# Altium PCB 单路驱动.PcbDoc
Units mil, origin at the board's own origin, x right, y up, seen from the top; angles counter-clockwise.
Board outline 2236.22 x 1855 mil, 2 copper layers (Top Layer, Bottom Layer); 48 components, 31 nets, 123 pads, 22 vias.
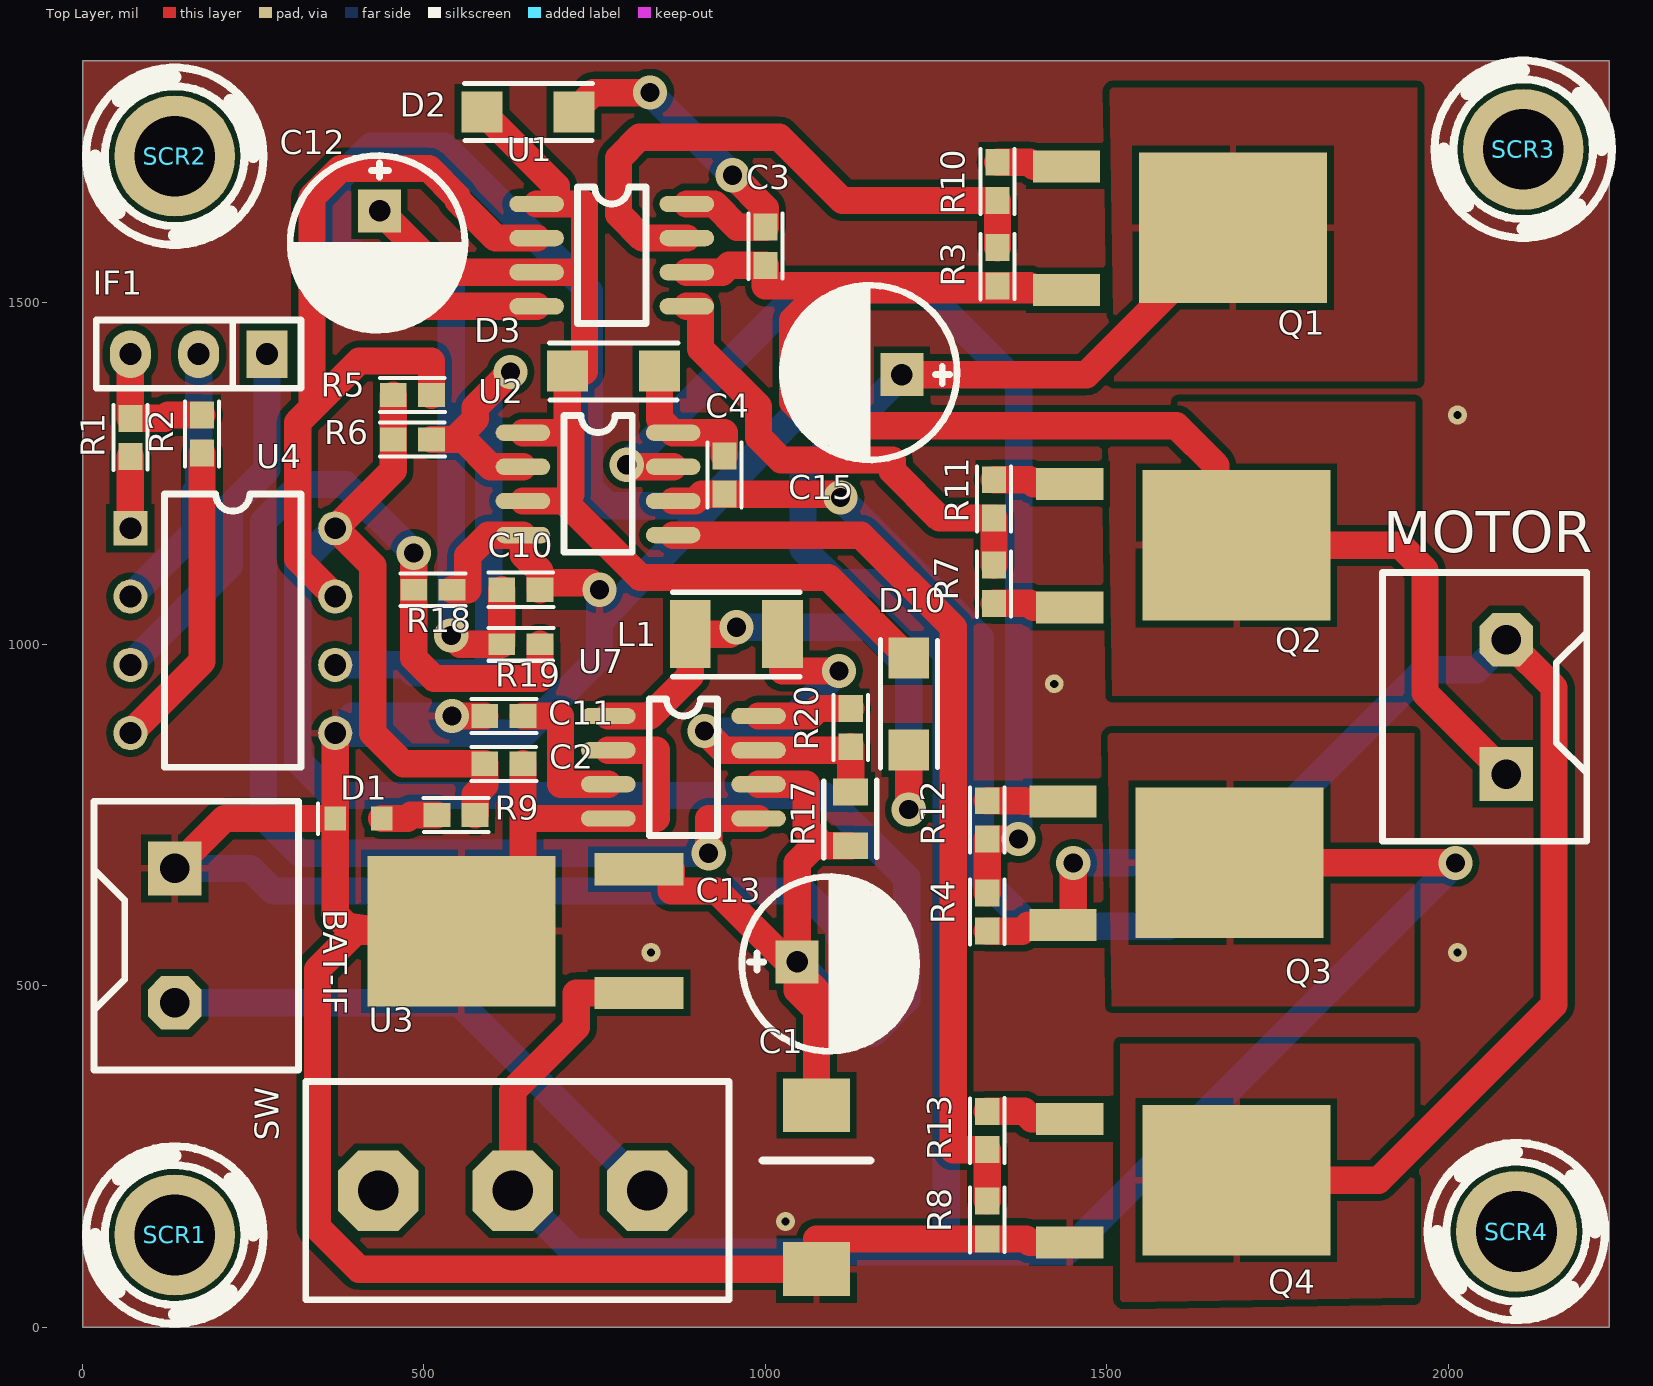
[diagram p0: Top Layer view]
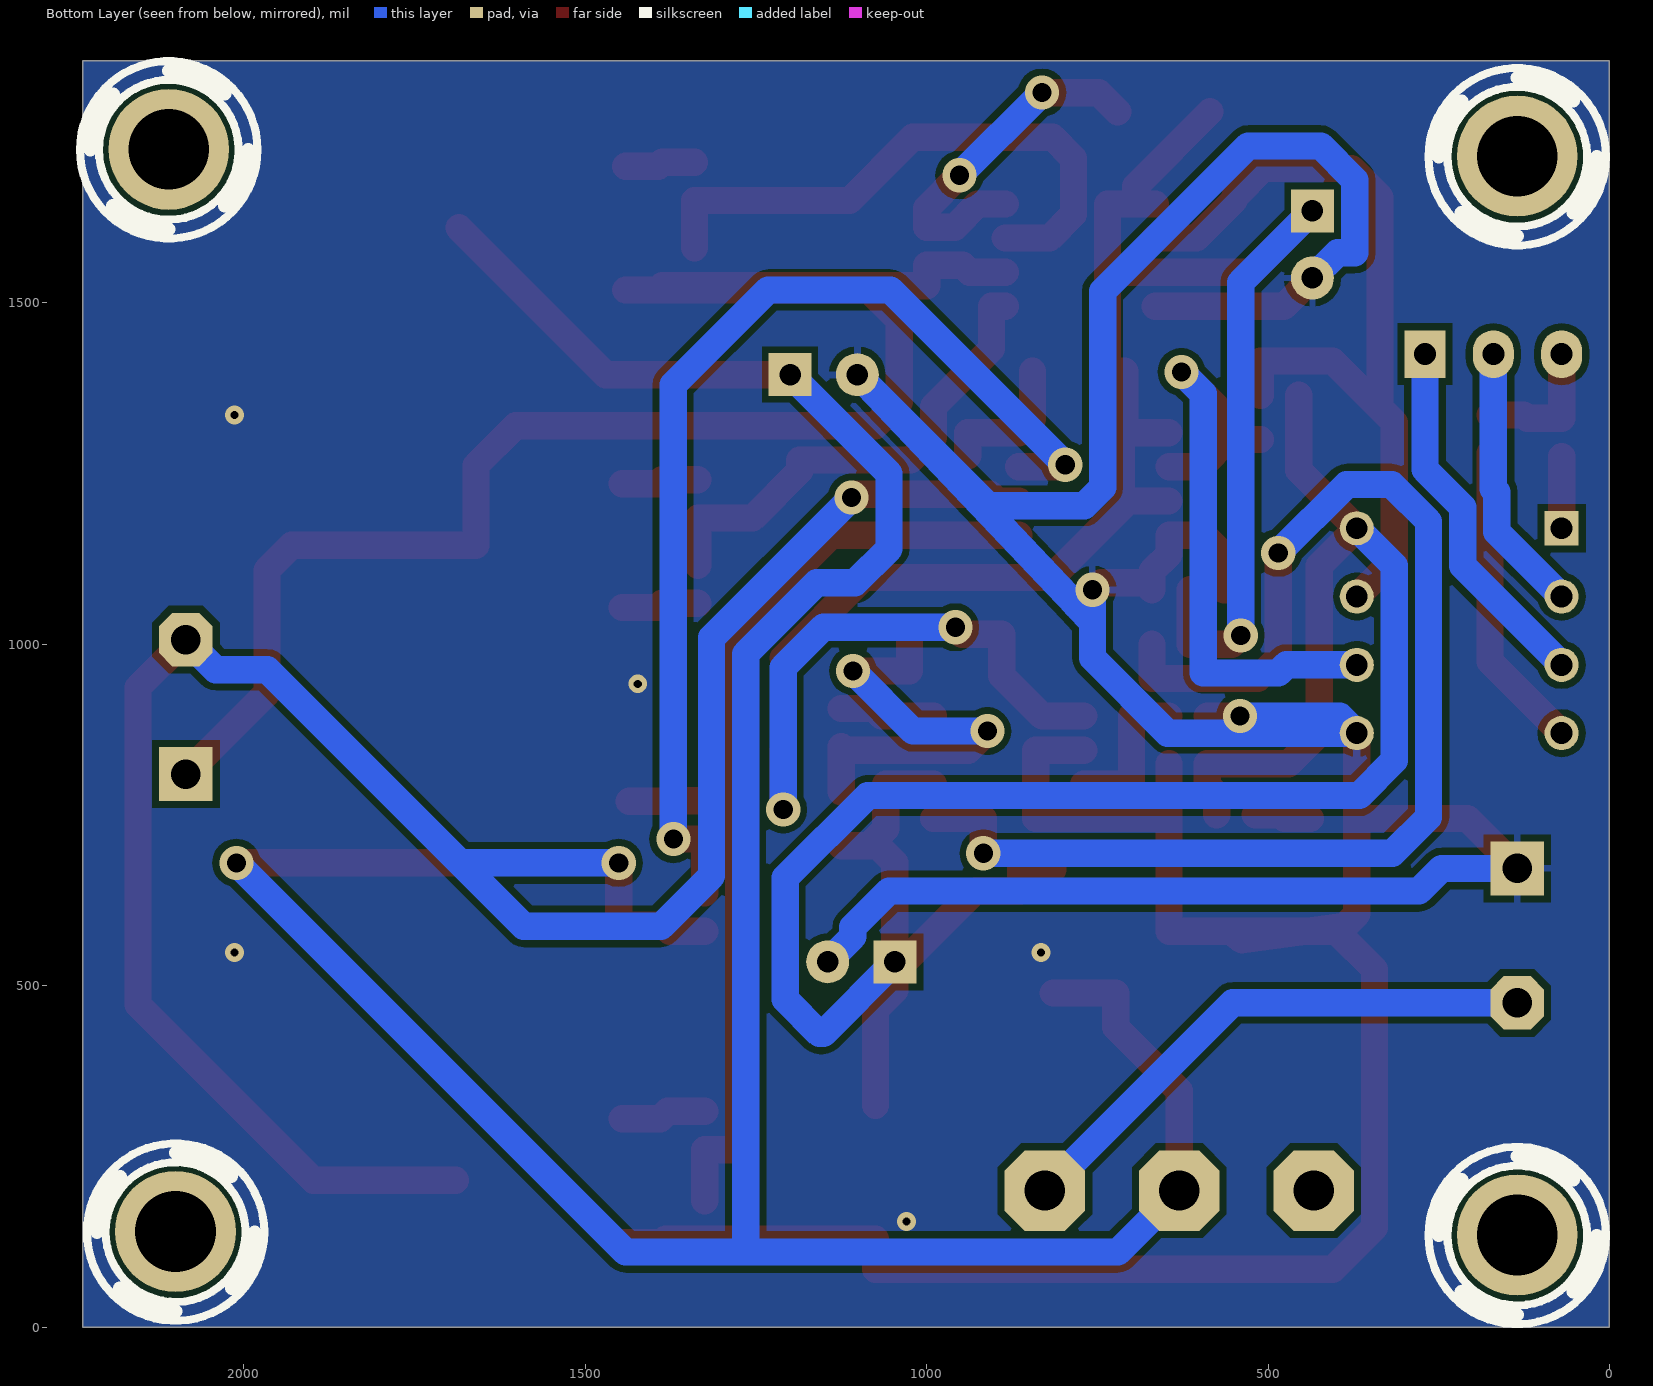
[diagram p1: Bottom Layer view, seen from below]

## Layer stack, top to bottom
Top Solder: solder mask 0.4, Solder Resist, Dk 3.5
Top Layer: signal copper 1.4
Dielectric 1: dielectric 12.6, FR-4, Dk 4.8
Bottom Layer: signal copper 1.4
Bottom Solder: solder mask 0.4, Solder Resist, Dk 3.5

## Board outline
0,0 2236.22,0 2236.22,1855 0,1855

## Design rules (kind name [scope] priority, off if disabled: settings)
Clearance [All] p1: gap=10 ignorepadtopadclearanceinfootprint=FALSE except(0: Arc-Hole Track-Hole SMDPad-Hole THPad-Hole Via-Hole Fill-Hole Poly-Hole Region-Hole Text-Hole)
ComponentClearance [All] p1 off: gap=10 collisioncheckmode=3 verticalgap=10 showdistances=FALSE
Height [All] p1 off: minheight=0 maxheight=1000 prefheight=500
PolygonConnect [All] p1: connectstyle=Relief reliefconductorwidth=10 reliefentries=4 polygonreliefangle="90 Angle" airgapwidth=10
RoutingVias [All] p1: holewidth=28 width=50 viastyle="Through Hole" minholewidth=28 minwidth=50 maxholewidth=28 maxwidth=50
SolderMaskExpansion [All] p1: expansion=4 istentingtop=FALSE
Width Width_1 [All] p1: maxlimit=50 minlimit=30 preferedwidth=40 minimp=50.000000 maximp=50.000000 favimp=50.000000
28 further rules are at their usual default settings.

## Classes and differential pairs
net class 12V: 12V VCC5V VCC12V

## Components (designator, comment, footprint, x,y, rotation, side; value= is the part's Value field where it differs from the comment)
BAT-IF "LQ_PIN2" LQ_PIN2 135,671.85 r270 top
C1 "330u" LQ_7343D 1075,325 r90 top
C2 "104" LQ_0603 589,825 r0 top
C3 "105" LQ_0603 1000,1611 r270 top
C4 "105" LQ_0603 940,1276 r270 top
C10 "0.1u" LQ_0603 614,1080 r0 top
C11 "220p" LQ_0603 645,895 r180 top
C12 "330u" LQ_220U16V 435,1635 r270 top
C13 "220u" LQ_220U16V 1046.57,535 r0 top
C15 "220u" LQ_220U16V 1200,1395 r180 top
D1 "RED" LQ_0603D 438,745 r180 top
D2 "1N5819" LQ_1206 720,1780 r180 top
D3 "1N5819" LQ_1206 845,1400 r180 top
D10 "1N5819" LQ_1206 1210,980 r270 top
IF1 "CON3" "Pin HDR1X3/2.54mm-S" 270,1425 r270 top
L1 "120uH" LQ_1210 890,1015 r0 top
MOTOR "MOTOR IF" LQ_PIN2 2085,810 r90 top
Q1 "7437" LQ_DPAK123 1440.91,1700 r270 top
Q2 "7437" LQ_DPAK123 1445.91,1235 r270 top
Q3 "7437" LQ_DPAK123 1435.91,770 r270 top
Q4 "7437" LQ_DPAK123 1445.91,305 r270 top
R1 "390" LQ_0603 70,1331 r270 top
R2 "390" LQ_0603 175,1336 r270 top
R3 "10K" LQ_0603 1340,1581 r270 top
R4 "10K" LQ_0603 1325,636 r270 top
R5 "390" LQ_0603 455,1365 r0 top
R6 "390" LQ_0603 455,1300 r0 top
R7 "10K" LQ_0603 1335,1116 r270 top
R8 "10K" LQ_0603 1325,185 r270 top
R9 "1K" LQ_0603 575,750 r180 top
R10 "33R" LQ_0603 1340,1650 r90 top
R11 "33R" LQ_0603 1335,1185 r90 top
R12 "33R" LQ_0603 1325,715 r90 top
R13 "33R" LQ_0603 1325,260 r90 top
R17 "0R5" LQ_0805 1125,705 r90 top
R18 "3K8" LQ_R0603 485,1080 r0 top
R19 "30K" LQ_R0603 670,1000 r180 top
R20 "220" LQ_0603 1125,906 r270 top
SCR1 "螺丝孔" LQ_SCROW3&5mm 135,135 r0 top
SCR2 "螺丝孔" LQ_SCROW3&5mm 135,1715 r0 top
SCR3 "螺丝孔" LQ_SCROW3&5mm 2110,1725 r0 top
SCR4 "螺丝孔" LQ_SCROW3&5mm 2100,140 r0 top
SW "SW-SPDT" LQ_SWSIP3 826.85,200 r180 top
U1 "IR2104" SO-8 665,1645 r0 top
U2 "IR2104" SO-8 645,1310 r0 top
U3 "LM7805-5V" LQ_DPAK 815,489.45 r90 top
U4 "HCPL2630" DIP8 70,1170 r0 top
U7 "MC34063" SO-8 770,895 r0 top

## Footprints (in the part's own frame and the unit in brackets; to place one, negate y for a bottom-side part, rotate by r counter-clockwise, add the part's x,y. Pads: shape width x height; smd on the part's side, far side on the other; paste and mask are expansions set on the pad)
DIP8 [mil]
  rect 50x50 hole 32: 1(0,0)
  round 50 hole 32: 2(0,-100) 3(0,-200) 4(0,-300) 5(300,-300) 6(300,-200) 7(300,-100) 8(300,0)
  silkscreen extent 50,-350 250,50, body extent -56,-369 354,65, height 175
LQ_220U16V [mm]
  rect 1.6x1.6 hole 0.8: 1(0,0)
  round 1.6 hole 0.8: 2(2.5,0)
  silkscreen extent -2.05,-3.32 4.44,3.17
LQ_0603 [mm]
  rect 1x0.9 smd: 1(0,0) 2(1.422,0)
  silkscreen extent -0.5,-0.64 1.92,0.64
LQ_0603D [mm]
  rect 0.8x0.9 smd: 1(0,0) 2(1.727,0)
  silkscreen extent 2.36,-0.56 2.36,0.58
LQ_0805 [mm]
  rect 1x1.3 smd: 1(0,0) 2(2,0)
  silkscreen extent -0.44,-0.97 2.44,1, body extent 0,-0.62 2,0.63, height 0.6
LQ_1206 [mil]
  rect 60x60 smd: 1(0,0) 2(135,0)
  silkscreen extent -27,-41 161,42
LQ_1210 [mil]
  rect 60x100 smd: 1(0,0) 2(135,0)
  silkscreen extent -26,-62 161,61
LQ_7343D [mm]
  rect 2x2.5 smd: 1(0,0) 2(-6.096,0)
  silkscreen extent -2.06,-2 -2.06,2, body extent -6.66,-2.17 0.64,2.13, height 2.8
LQ_DPAK [mm]
  rect 1.2x3.302 smd: 1(0,0) 3(4.6,0)
  rect 5.6x7 smd: 2(2.3,6.604)
LQ_DPAK123 [mm]
  rect 1.2x2.5 smd: 1(0,0) 2(4.6,0)
  rect 5.6x7 smd: 3(2.286,6.2)
LQ_PIN2 [mm]
  rect 2x2 hole 1.1: 1(0,0)
  oct 2x2 hole 1.1: 2(5,0)
  silkscreen extent -2.5,-3 7.5,4.6, body extent -2.81,-2.97 7.79,4.63, height 10
LQ_R0603 [mm]
  rect 1x0.8 smd: 1(0,0) 2(1.422,0)
  silkscreen extent -0.5,-0.61 1.92,0.61, body extent -0.08,-0.4 1.52,0.4, height 0.23
LQ_SCROW3&5mm [mm]
  round 4.5 hole 3: 1(0,0)
  silkscreen extent -3.3,-3.3 3.3,3.3, body extent -3,-3 3,3, height 1.3
LQ_SWSIP3 [mm]
  oct 3x3 hole 1.5: 1(0,0) 2(5,0) 3(10,0)
  silkscreen extent -3.05,-4.06 12.7,4.06, body extent -1.47,-5.46 11.53,5.6, height 28.43
"Pin HDR1X3/2.54mm-S" [mil]
  rect 70x60 hole 32: 1(0,0)
  oval 70x60 hole 32: 2(0,-100) 3(0,-200)
  silkscreen extent -50,-250 50,50, body extent -50,-250 50,50, height 336
SO-8 [mil]
  oval 80x24 smd: 1(0,0) 2(0,-50) 3(0,-100) 4(0,-150) 5(220,-150) 6(220,-100) 7(220,-50) 8(220,0)
  silkscreen extent 60,-175 160,25

## Part data
BAT-IF: "Jumper"
C1: library part CAPACITOR, "Capacitor"
C2 C10 C11: library part CAP, "Capacitor"
C3 C4: library part LQ_CAP, "CAP"
C12 C13 C15: library part LQ_CAP_POL, "10u"
D1: library part LQ_LED
D2 D3 D10: library part LQ_DIODE
IF1: library part "Pin HDR1X3"
L1: library part INDUCTOR
MOTOR: library part "MOTOR AC"
Q1 Q2 Q3 Q4: library part BSS138N, "BSS138N"
R1 R2 R3 R4 R5 R6 R7 R8 R9 R10 R11 R12 R13 R18 R19 R20: library part LQ_RES, "RES"
R17: library part RES2
SCR1 SCR2 SCR3 SCR4: library part CON1, "Connector"
U3: library part LM7805
U4: "6N137 2631"

## Via types
v1: diameter 50, hole 28, Top Layer to Bottom Layer, 17 vias
v2: diameter 27.56, hole 11.81, Top Layer to Bottom Layer, 5 vias

## Nets (pads, with @x,y where several pads share a name; then routed paths per layer and width w, separated by ;. In a path a pad name is that pad's centre, name@x,y a point inside that pad or via, vN(x,y) a via of type N, cw(c..) or ccw(c..) an arc to the next point about the centre after c; other vN are vias at no path point)
12V: C10.1 C12.1 D2.2 D3.2 D10.1 R19.2 U1.1 U1.3 U2.1 U2.3 | length 2606.6
  Top Layer w40: C12.1 525,1545 U1.3 735,1545 ; v1(540,1013) 553,1000 R19.2 C10.1 ; D2.2 693.79,1671.21 U1.1@693.79,1645 ; U2.3 705,1210 ; U2.1 710,1310 ; U1.1 U1.1@693.79,1645 ; D10.1 1092,1098 817,1098 705,1210 ; U1.1@693.79,1645 735,1645 735,1545 ; 705,1210 715,1220 715,1310 710,1310 ; 710,1310 D3.2 735,1400 735,1545
  Bottom Layer w40: C12.1 540,1530 v1(540,1013)
BAT: C15.1 Q1.3 Q3.3 SW.2 U3.1 | length 4444.3
  Top Layer w40: SW.2 630,346 723,439 723,489.45 U3.1 ; C15.1 1470,1395 Q1.3 ; Q3.3 v1(2011,680)
  Bottom Layer w40: SW.2 720,110 1265,110 ; C15.1 1055,1250 1055,1140 1105,1090 1161,1090 1265,986 1265,110 ; v1(2011,680) 1441,110 1265,110
GND: BAT-IF.1 C1.2 C2.2 C10.2 C11.2 C12.2 C13.2 C15.2 D1.2 Q4.2 R8.2 R18.2 U1.4 U2.4 U3.2 U4.5 U7.2 U7.4 | length 7564.8
  Top Layer w40: BAT-IF.1 208.15,745 D1.2 ; U4.5 D1.2 ; 387.41,587.59 538.21,567.21 551.39,577.25 U3.2 ; 400.19,580 344,523.81 344,146 405,85 C1.2 1075,129 R8.2 1382,129 1387.1,123.9 Q4.2 ; C12.2 476.58,1495 U1.4 ; v1(541,895) C11.2 ; R18.2 564,1080 564,1130 594,1160 U2.4 645,1132 670,1107 C10.2 680,1090 744.29,1090 754.29,1080 v1(757,1080) ; C2.2 645,745 ; U7.2 840,845 840,745 U7.4 645,745 ; D1.2 370,605 394.5,580.5 395,580 538.21,580 U3.2 ; U3.2 645,580 645,745
  Bottom Layer w40: BAT-IF.1 245.81,671.85 278.84,638.82 1055,638.82 1108,585.82 1108,572 C13.2 ; C12.2 398,1573.58 373,1573.58 373,1680 423,1730 529,1730 742,1517 742,1230 769,1203 909.58,1203 C15.2 780.86,1057.33 757,1032.21 ; v1(541,895) 395,895 U4.5 541,870 647,870 757,980 757,1032.21 ; v1(757,1080) 757,1032.21
  other v2: 1029.41,154.8 832.56,548.5 2013.66,548.5 1423.11,942.2 2013.66,1335.91
M1: C3.2 MOTOR.1 Q1.2 Q2.3 R3.2 U1.6 | length 2528.6
  Top Layer w40: U1.6 937,1545 947,1555 C3.2 1000,1525 R3.2 1387,1525 Q1.2@1393.1,1518.9 ; Q1.2 Q1.2@1393.1,1518.9 ; MOTOR.1 1966,929 1966,1109 1930,1145 Q2.3 1660,1145 1660,1262 1602,1320 1075,1320 1040,1355 1040,1475 1083.9,1518.9 Q1.2@1393.1,1518.9
M2: C4.2 MOTOR.2 Q3.2 Q4.3 R4.2 U2.6 | length 3452.8
  Top Layer w40: U2.6 897,1210 907,1220 C4.2 1105,1220 v1(1110,1215) ; R4.2 1376,580 1384.9,588.9 Q3.2 1451,588.9 v1(1451,680) ; Q4.3 1898,215 2155,472 2155,936.85 MOTOR.2
  Bottom Layer w40: v1(1110,1215) 1315,1010 1315,661 1389,587 1590,587 1683,680 ; v1(1451,680) 1683,680 ; MOTOR.2 2041,962.85 1965.85,962.85 1683,680
M3V3: IF1.3 R1.1 R2.1 | length 201.1
  Top Layer w40: IF1.3 R1.1 120,1331 125,1336 R2.1
NetC3_1: C3.1 D2.1 U1.8 | length 518.7
  Top Layer w40: D2.1 748,1808 v1(831,1808) ; U1.8 925,1645 959,1611 C3.1 1000,1639 v1(952,1687)
  Bottom Layer w40: v1(831,1808) v1(952,1687)
NetC4_1: C4.1 D3.1 U2.8 | length 207.3
  Top Layer w40: D3.1 845,1330 U2.8 940,1310 C4.1
NetC11_1: C11.1 U7.3 | length 225
  Top Layer w40: C11.1 700,895 700,795 U7.3
NetD1_1: D1.1 R9.2 | length 83.1
  Top Layer w40: D1.1 476,745 481,750 R9.2
NetD10_2: D10.2 L1.1 U7.1 | length 849.1
  Top Layer w40: U7.1 831,895 890,954 L1.1 948,1015 v1(958,1025) ; v1(1210,758) D10.2
  Bottom Layer w40: v1(958,1025) 1151.19,1025 1210,966.19 v1(1210,758)
NetL1_2: L1.2 R17.2 R20.2 U7.7 | length 662.3
  Top Layer w40: v1(911,873) 939,845 U7.7 R20.2@1125,845 ; L1.2 1025,961 v1(1108,961) ; R17.2 R20.2@1125,845 ; R20.2 R20.2@1125,845
  Bottom Layer w40: v1(911,873) 1020,873 v1(1108,961)
NetQ1_1: Q1.1 R10.2 | length 103.4
  Top Layer w40: R10.2 1387,1706 1393,1700 Q1.1
NetQ2_1: Q2.1 R11.2 | length 113.4
  Top Layer w40: R11.2 1387,1241 1393,1235 Q2.1
NetQ2_2: Q2.2 R7.2 | length 113.4
  Top Layer w40: R7.2 1387,1060 1393.1,1053.9 Q2.2
NetQ3_1: Q3.1 R12.2 | length 111.3
  Top Layer w40: R12.2 1379,771 1380,770 Q3.1
NetQ4_1: Q4.1 R13.2 | length 125.5
  Top Layer w40: R13.2 1379,316 1390,305 Q4.1
NetR1_2: R1.2 U4.1 | length 105
  Top Layer w40: U4.1 R1.2
NetR2_2: R2.2 U4.4 | length 453.5
  Top Layer w40: U4.4 175,975 R2.2
NetR3_1: R3.1 R10.1 U1.7 | length 871.5
  Top Layer w40: U1.7 820,1595 785,1630 785,1711.98 815.55,1742.52 1020.48,1742.52 1113,1650 R10.1 R3.1
NetR4_1: R4.1 R12.1 U2.7 | length 1596.9
  Top Layer w40: v1(797,1263) 800,1260 U2.7 ; R4.1 R12.1 v1(1371,715)
  Bottom Layer w40: v1(797,1263) 1053,1519 1232,1519 1371,1380 v1(1371,715)
NetR7_1: R7.1 R11.1 U1.5 | length 719.5
  Top Layer w40: U1.5 905,1495 905,1433 990,1348 990,1303 1023,1270 1186,1270 1186,1254 1255,1185 R11.1 R7.1
NetR8_1: R8.1 R13.1 U2.5 | length 1355.9
  Top Layer w40: U2.5 1140,1160 1275,1025 1275,260 R13.1 R8.1
NetR18_1: R18.1 R19.1 U7.5 | length 1916.2
  Top Layer w40: v1(485,1134) R18.1 485,980 515,950 670,950 R19.1 ; v1(917,694) 917,745 U7.5
  Bottom Layer w40: v1(485,1134) 385,1234 319,1234 265,1180 265,746.92 317.92,694 v1(917,694)
NetR20_1: R20.1 U7.8 | length 139.6
  Top Layer w40: U7.8 1066,895 1077,906 R20.1
P1: R5.2 U1.2 U4.7 | length 1261.1
  Top Layer w40: U4.7 315,1125 315,1325 336,1346 ; R5.2 511,1415 405,1415 336,1346 ; U1.2 605,1595 549,1651 549,1655 507,1697 378,1697 336,1655 336,1346
P2: R6.2 U2.2 U4.6 | length 967.8
  Top Layer w40: R6.2 545,1300 ; v1(627,1399) 575,1347 575,1330 545,1300 ; U2.2 598,1260 558,1300 545,1300
  Bottom Layer w40: U4.6 473,970 485,958 595,958 595,1367 v1(627,1399)
PWM1: IF1.2 U4.2 | length 396.4
  Bottom Layer w40: U4.2 164.92,1164.92 164.92,1223 170,1228.08 IF1.2
PWM2: IF1.1 U4.3 | length 537.8
  Bottom Layer w40: U4.3 215,1115 215,1201 270,1256 IF1.1
VCC5V: C1.1 C2.1 C13.1 R5.1 R6.1 R9.1 R17.1 U3.3 U4.8 U7.6 | length 3550.9
  Top Layer w40: R5.1 R6.1 455,1255 U4.8 425,1115 425,870 470,825 C2.1 589,794 575,780 R9.1 ; U3.3 862.32,670.55 862.32,638.82 928.73,638.82 C13.1@1046.58,520.98 ; U7.6 1060,795 1060,730 1085,705 ; C1.1 1075,465 ; R17.1 1085,705 ; C13.1@1046.58,520.98 1075,492.55 1075,465 ; C13.1@1046.58,520.98 C13.1 1046.58,680 1071.58,705 1085,705 ; C13.1@1046.58,520.98 1046.58,493.42 1075,465
  Bottom Layer w40: U4.8 315,1115 315,830 366.45,778.55 1086.45,778.55 1207,658 1207,480 1157,430 1151.58,430 C13.1
VCC12V: BAT-IF.2 SW.1 | length 805.8
  Bottom Layer w40: BAT-IF.2 551.85,475 SW.1
pads on no net: SCR1.1 SCR2.1 SCR3.1 SCR4.1 SW.3

## Polygon pours and split planes (outlines as drawn)
GND on Top Layer "GND_L01_P004" (solid, pour order 4): 0,1855 0,0 2236.22,0 2236.22,1855
BAT on Top Layer "BAT_L01_P002" (solid, pour order 2): 1501.54,870 1950,870 1950,470 1507.43,470
M2 on Top Layer "M2_L01_P003" (solid, pour order 3): 1520,36.54 1520,415 1950,415 1950,42.87
BAT on Top Layer "BAT_L01_P001" (solid, pour order 1): 1504.41,1815 1955,1815 1955,1385 1510.74,1385
M1 on Top Layer "M1_L01_P000" (solid, pour order 0): 1501.54,1355 1880,1355 1880,925 1507.87,925
GND on Bottom Layer "GND_L02_P005" (solid, pour order 5): 0,1855 0,0 2236.22,0 2236.22,1855

## Silkscreen, mask and mechanical layers (free items; w line width, h text height)
Mechanical 1:
  the board outline again, w10